# Altium PCB PCB.PcbDoc
Units mm, origin at the board's own origin, x right, y up, seen from the top; angles counter-clockwise.
Board outline 100.08 x 50.04 mm, 2 copper layers (Top Layer, Bottom Layer); 74 components, 44 nets, 202 pads, 18 vias.
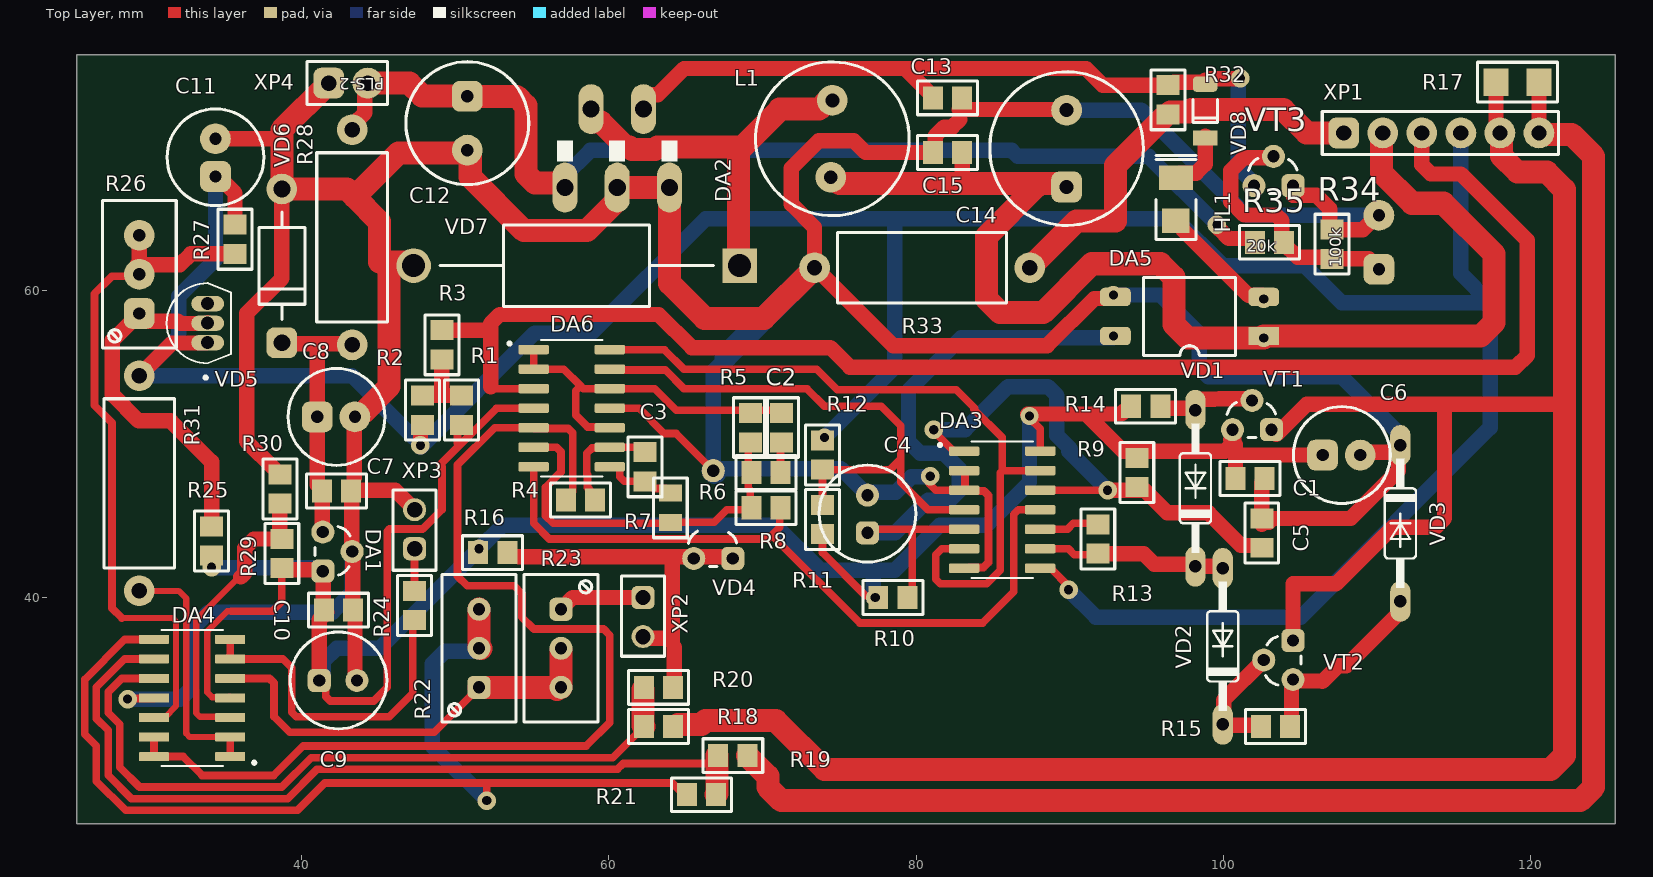
[diagram p0: Top Layer view]
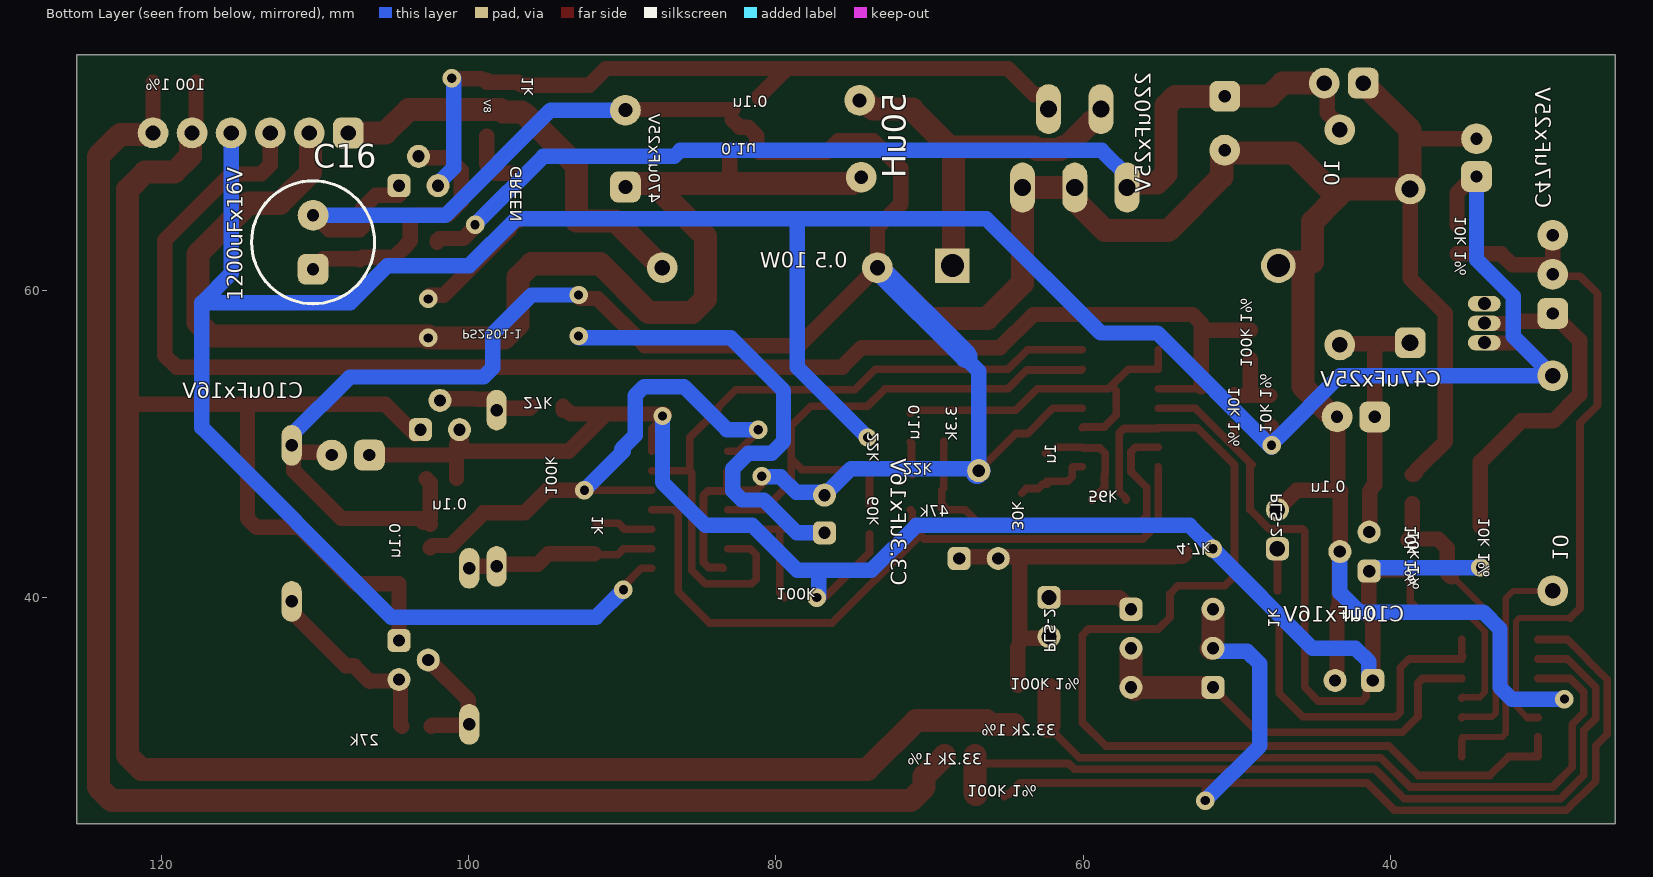
[diagram p1: Bottom Layer view, seen from below]

## Layer stack, top to bottom
Top Solder: solder mask 0.0102, Solder Resist, Dk 3.5
Top Layer: signal copper 0.0356
Dielectric 1: dielectric 0.32, FR-4, Dk 4.8
Bottom Layer: signal copper 0.0356
Bottom Solder: solder mask 0.0102, Solder Resist, Dk 3.5

## Board outline
25.4,25.273 25.4,75.311 125.476,75.311 125.476,25.273

## Design rules (kind name [scope] priority, off if disabled: settings)
Clearance [All] p1: gap=0.254 ignorepadtopadclearanceinfootprint=FALSE except(0: Arc-Hole Track-Hole SMDPad-Hole THPad-Hole Via-Hole Fill-Hole Poly-Hole Region-Hole Text-Hole)
PolygonConnect [All] p1: connectstyle=Relief reliefconductorwidth=0.254 reliefentries=4 polygonreliefangle="90 Angle" airgapwidth=0.254
RoomDefinition Main [InComponentClass('Main')] p1: confinementstyle=ConfineIn formatcopy=TRUE lockcomponents=FALSE outline 46.101,25.527 124.968,25.527 124.968,56.769 46.101,56.769
RoomDefinition Power [InComponentClass('Power')] p2: confinementstyle=ConfineIn formatcopy=TRUE lockcomponents=FALSE outline 25.527,75.127 25.527,28.772 45.827,28.772 45.827,75.127
RoomDefinition Heater [InComponentClass('Heater')] p3: confinementstyle=ConfineIn formatcopy=TRUE lockcomponents=FALSE outline 46.609,57.023 123.952,57.023 123.952,75.184 46.609,75.184
RoutingVias [All] p1: holewidth=0.711 width=1.27 viastyle="Through Hole" minholewidth=0.711 minwidth=1.27 maxholewidth=0.711 maxwidth=1.27
SolderMaskExpansion [All] p1: expansion=0.102 istentingtop=FALSE
Width [All] p1: maxlimit=2 minlimit=0.2 preferedwidth=1 toplayer_prefwidth=0.5 bottomlayer_minwidth=0.5 minimp=50.000000 maximp=50.000000 favimp=50.000000
30 further rules are at their usual default settings.

## Classes and differential pairs
component class Power: C7 C8 C9 C10 C11 DA1 DA4 R25 R26 R27 R28 R29 R30 R31 VD5 VD6 XP4
component class Main: C1 C2 C3 C4 C5 C6 DA3 DA5 DA6 R1 R2 R3 R4 R5 R6 R7 R8 R9 R10 R11 R12 R13 R14 R15 R16 R17 R18 R19 R20 R21 R22 R23 R24 VD1 VD2 VD3 VD4 VT1 VT2 XP1 XP2 XP3
component class Heater: C12 C13 C14 C15 C16 DA2 HL1 L1 R32 R33 R34 R35 VD7 VD8 VT3

## Components (designator, comment, footprint, x,y, rotation, side; value= is the part's Value field where it differs from the comment)
C1 "0.1u" CR2012-0805#1 101.727,47.752 r0 top
C2 "0.1u" CR2012-0805#1 71.247,51.054 r270 top
C3 "1u" CR2012-0805#1 62.357,48.514 r270 top
C4 "C3.3uFx16V" C6.3x11#1 76.835,45.466 r90 top
C5 "0.1u" CR2012-0805#1 102.489,44.196 r270 top
C6 "C10uFx16V" C6.3x11#2 107.696,49.276 r0 top
C7 "0.1u" CR2012-0805#1 42.291,46.933 r0 top
C8 "C47uFx25V" C6.3x11#2 42.291,51.759 r0 top
C9 "C10uFx16V" C6.3x11#1 42.418,34.614 r0 top
C10 "0.1u" CR2012-0805#1 42.418,39.186 r0 top
C11 "C47uFx25V" C6.3x11#2 34.417,68.65 r90 top
C12 "220uFx25V" C8x11.5 50.8,70.866 r270 top
C13 "0.1u" CR2012-0805#1 82.042,72.517 r0 top
C14 "470uFx25V" C10x16 89.789,69.215 r90 top
C15 "0.1u" CR2012-0805#1 82.042,68.961 r180 top
C16 "1200uFx16V" C8x20 110.109,63.119 r90 bottom
DA1 "L78L08ACZ'" to-92 41.402,42.996 r90 top
DA2 "LM2576ADJ" TO220-5 60.554,74.886 r0 top
DA3 "CD4066BM" SOIC127P600X175-14N 85.598,45.72 r0 top
DA4 "LM324" SOIC127P600X175-14N 32.893,33.471 r180 top
DA5 "PS2501-1" "DIP4-Gull Wing" 102.616,57.023 r180 top
DA6 "LM324" SOIC127P600X175-14N 57.593,52.324 r0 top
HL1 "GREEN" CR3216-1206-LED 96.901,65.913 r90 top
L1 "50uH" RCH114 74.549,69.85 r270 top
R1 "10k 1%" CR2012-0805#1 50.419,52.197 r270 top
R2 "10k 1%" CR2012-0805#1 47.879,52.197 r90 top
R3 "100k 1%" CR2012-0805#1 49.149,56.449 r90 top
R4 "56k" CR2012-0805#1 58.166,46.355 r180 top
R5 "3.3k" CR2012-0805#1 69.215,51.054 r270 top
R6 "22k" CR2012-0805#1 70.231,48.133 r180 top
R7 "30k" CR2012-0805#2 64.008,45.847 r90 top
R8 "47k" CR2012-0805#1 70.231,45.847 r0 top
R9 "100k" CR2012-0805#1 94.361,48.133 r90 top
R10 "100k" CR2012-0805#1 78.486,40.005 r180 top
R11 "60k" CR2012-0805#1 73.914,45.085 r270 top
R12 "22k" CR2012-0805#1 73.914,49.276 r270 top
R13 "1k" CR2012-0805#1 91.821,43.815 r270 top
R14 "27k" CR2012-0805#1 94.935,52.451 r180 top
R15 "27k" CR2012-0805#1 103.378,31.623 r180 top
R16 "4.7k" CR2012-0805#1 52.451,42.926 r180 top
R17 "100 1%" CR3216-1206 119.126,73.533 r0 top
R18 "33.2k 1%" CR2012-0805#1 63.246,31.623 r0 top
R19 "33.2k 1%" CR2012-0805#1 68.072,29.718 r0 top
R20 "100k 1%" CR2012-0805#1 63.246,34.163 r180 top
R21 "100k 1%" CR2012-0805#1 66.04,27.178 r180 top
R22 "1.37k" 3296W#1 51.562,36.703 r90 top
R23 "2.21k" 3296W#1 56.896,36.703 r270 top
R24 "1k" CR2012-0805#1 47.371,39.497 r90 top
R25 "10k 1%" CR2012-0805#1 34.163,43.692 r270 top
R26 "17.4k" 3296W#2 29.464,61.03 r90 top
R27 "10k 1%" CR2012-0805#1 35.687,63.316 r270 top
R28 "10" R-1W 43.307,63.443 r270 top
R29 "10k 1%" CR2012-0805#1 38.735,42.869 r270 top
R30 "10k 1%" CR2012-0805#1 38.608,47.06 r270 top
R31 "10" R-1W 29.464,47.441 r90 top
R32 "1k" CR2012-0805#1 96.393,72.39 r270 top
R33 "0.5 10W" R-1W 80.391,61.468 r0 top
R34 "100k" CR2012-0805#1 107.061,62.992 r90 top
R35 "20k" CR2012-0805#1 102.997,63.119 r0 top
VD1 "1N4148" DO35-10 98.171,47.117 r90 top
VD2 "1N4148" DO35-10 99.949,36.83 r90 top
VD3 "1N4148" DO35-10 111.506,44.831 r270 top
VD4 "TL-431LP" TO-92#1 66.802,42.545 r180 top
VD5 "LM385Z-1.2/NOPB" DIO_LM385Z-2.5/NOPB 33.909,57.855 r90 top
VD6 "18V1W" DO-41 38.735,66.585 r270 top
VD7 "1N5822" DIOAD2120W130L950D530P 57.912,61.595 r180 top
VD8 "8V" SOD-80 98.806,73.406 r270 top
VT1 "2N3904" TO-92#2 101.854,50.927 r180 top
VT2 "2N3906" TO-92#2 104.521,35.941 r270 top
VT3 "2N3906" TO-92#2 103.251,66.802 r180 top
XP1 "PLS-6" PLS-6 107.823,70.231 r90 top
XP2 "PLS-2" PLS-2#1 62.23,40.005 r0 top
XP3 "PLS-2" PLS-2#1 47.371,43.18 r180 top
XP4 "PLS-2" PLS-2#2 41.783,73.476 r90 top

## Footprints (in the part's own frame and the unit in brackets; to place one, negate y for a bottom-side part, rotate by r counter-clockwise, add the part's x,y. Pads: shape width x height; smd on the part's side, far side on the other; paste and mask are expansions set on the pad)
3296W#1 [mm]
  rrect50% 1.5x1.5 hole 0.8: 1(-2.54,0)
  round 1.5 hole 0.8: 2(0,0) 3(2.54,0)
  silkscreen extent -4.8,-2.4 4.8,2.4
3296W#2 [mm]
  rrect50% 2x2 hole 0.8: 1(-2.54,0)
  round 2 hole 0.8: 2(0,0) 3(2.54,0)
  silkscreen extent -4.8,-2.4 4.8,2.4
C6.3x11#1 [mm]
  rrect50% 1.5x1.5 hole 0.8: 1(-1.25,0)
  round 1.5 hole 0.8: 2(1.2,0)
  silkscreen extent -3.15,-3.15 3.15,3.15
C6.3x11#2 [mm]
  rrect50% 2x2 hole 0.8: 1(-1.25,0)
  round 2 hole 0.8: 2(1.2,0)
  silkscreen extent -3.15,-3.15 3.15,3.15
C8x11.5 [mm]
  rrect50% 2x2 hole 0.8: 1(-1.75,0)
  round 2 hole 0.8: 2(1.75,0)
  silkscreen extent -4,-4 4,4
C8x20 [mm]
  rrect50% 2x2 hole 0.8: 1(-1.75,0)
  round 2 hole 0.8: 2(1.75,0)
  silkscreen extent -4,-4 4,4
C10x16 [mm]
  rrect50% 2x2 hole 0.9: 1(-2.5,0)
  round 2 hole 0.9: 2(2.5,0)
  silkscreen extent -5,-5 5,5
CR2012-0805#1 [mm]
  rect 1.3x1.5 smd: 1(-0.95,0) 2(0.95,0)
  silkscreen extent -1.95,-1.1 1.95,1.1
CR2012-0805#2 [mm]
  rect 1.1x1.5 smd: 1(-0.95,0) 2(0.95,0)
  silkscreen extent -1.95,-1.1 1.95,1.1
CR3216-1206 [mm]
  rect 1.6x1.8 smd: 1(-1.4,0) 2(1.4,0)
  silkscreen extent -2.6,-1.3 2.6,1.3
CR3216-1206-LED [mm]
  rect 1.6x1.8 smd: 1(-1.4,0)
  rect 1.6x2.2 smd: 2(1.4,0)
  silkscreen extent -2.6,-1.3 2.85,1.3
DIO_LM385Z-2.5/NOPB [mm]
  oval 1x2.14 hole 0.85 mask+0: 1(-1.27,0) 2(0,0) 3(1.27,0)
  silkscreen extent -3.64,-1.52 2.61,2.67
DIOAD2120W130L950D530P [mm]
  round 2.25 hole 1.5: A(10.6,0)
  rect 2.25x2.25 hole 1.5: C(-10.6,0)
  silkscreen extent -8.89,-2.65 8.89,2.65
"DIP4-Gull Wing" [mm]
  rect 2x1.2 smd: 1(0,0)
  rrect50% 2x1.2 smd: 2(0,-2.54) 3(9.65,-2.54) 4(9.65,0)
  silkscreen extent 1.84,-3.81 7.82,1.27
DO35-10 [mil]
  oval 104x52 hole 32: A(200,0) C(-200,0)
  silkscreen extent -165,-40 165,40
DO-41 [mm]
  round 2 hole 1.1: 1(0,0)
  rrect50% 2x2 hole 1.1: 2(10,0)
  silkscreen extent 1.5,-1.5 8.5,1.5
PLS-2#1 [mm]
  rrect50% 1.5x1.5 hole 1: 1(0,0)
  round 1.5 hole 1: 2(0,-2.54)
  silkscreen extent -1.4,-3.82 1.4,1.4
PLS-2#2 [mm]
  rrect50% 2x2 hole 1: 1(0,0)
  round 2 hole 1: 2(0,-2.54)
  silkscreen extent -1.4,-3.82 1.4,1.4
PLS-6 [mm]
  rrect50% 2x2 hole 1: 1(0,0)
  round 2 hole 1: 2(0,-2.54) 3(0,-5.08) 4(0,-7.62) 5(0,-10.16) 6(0,-12.7)
  silkscreen extent -1.4,-13.97 1.4,1.4
R-1W [mm]
  round 2 hole 1: 1(-7,0) 2(7,0)
  silkscreen extent -5.5,-2.3 5.5,2.3
RCH114 [mm]
  round 2 hole 0.9: 1(-2.5,0) 2(2.5,-0.1)
  silkscreen extent -5,-5 5,5
SOD-80 [mm]
  rrect50% 1x1.6 smd: 1(0,0)
  rect 1x1.6 smd: 2(3.5,0)
  silkscreen extent 1,-0.8 2.5,0.8
SOIC127P600X175-14N [mm]
  rrect25% 1.97x0.6 smd: 1(-2.475,3.81) 2(-2.475,2.54) 3(-2.475,1.27) 4(-2.475,0) 5(-2.475,-1.27) 6(-2.475,-2.54) 7(-2.475,-3.81) 8(2.475,-3.81) 9(2.475,-2.54) 10(2.475,-1.27) 11(2.475,0) 12(2.475,1.27) 13(2.475,2.54) 14(2.475,3.81)
  silkscreen extent -4.14,-4.43 2,4.43
TO220-5 [mil]
  oval 64x128 hole 44: 1(-134,-323.26) 2(-67,-122.26) 3(0,-323.26) 4(67,-122.26) 5(134,-323.26)
  silkscreen extent -154,-256 154,-203
to-92 [mm]
  rrect50% 1.5x1.5 hole 0.8: 1(-1.27,0)
  round 1.5 hole 0.8: 2(0,-1.905) 3(1.27,0)
  silkscreen extent -1.52,-1.78 1.62,0.51
TO-92#1 [mm]
  rrect50% 1.5x1.5 hole 0.8: 1(-1.27,0)
  round 1.5 hole 0.8: 2(0,-5.715) 3(1.27,0)
  silkscreen extent -1.52,-1.78 1.62,0.51
TO-92#2 [mm]
  rrect50% 1.5x1.5 hole 0.8: 1(-1.27,0)
  round 1.5 hole 0.8: 2(0,-1.905) 3(1.27,0)
  silkscreen extent -1.52,-1.78 1.62,0.51

## Part data
C1 C2 C5 C7 C10 C13 C15: library part C0805-0.1u-X7R
C3: library part C0805-1u-X7R
C4: library part C10uFx16V
C12: library part "C220uFx25V YAGEO SY", "SY025M0220A3F-0811"
C14: library part "C470uFx25V KF"
C16: library part "C1000uFx16V LZ"
DA2: "<B>LM 2576 Adj</B><br> SIMPLE SWITCHER 3-A Step-Down Voltage Regulator", Package=None, Availability=Unavailable, MF="ON Semiconductor", MP=LM2576ADJ, Price=None, SnapEDA_Link=https://www.snapeda.com/parts/LM2576ADJ/ON%20Semiconductor/view-part/543608/?ref=snap
DA3: "Bilateral, FET Switches 1 x 1:1 14-SOIC", Package="SOIC-14 Texas Instruments", Availability=Unavailable, MF="Texas Instruments", MP=CD4066BM, Price=None, SnapEDA_Link=https://www.snapeda.com/parts/CD4066BM/Texas%20Instruments/view-part/342060/?ref=snap
DA4 DA6: "General Purpose Amplifier 4 Circuit 14-SOIC", Package="SOIC-14 Texas Instruments", Availability=Unavailable, MF="Texas Instruments", MP=LM324, Price=None, SnapEDA_Link=https://www.snapeda.com/parts/LM324/Texas%20Instruments/view-part/2758578/?ref=snap
HL1: library part LED_GREEN_1206
L1: library part RCH114NP-221KB
R1 R2 R25 R27 R29 R30: library part R0805-10k-1%
R3 R9 R10 R20 R21 R34: library part R0805-100k-5%
R4: library part R0805-51k-5%
R5: library part R0805-3k3-5%
R6 R12 R14 R15: library part R0805-22k-5%
R7: library part R0805-30k-5%
R8 R11: library part R0805-47k-5%
R13 R24 R32: library part R0805-1k-5%
R16: library part R0805-4k7-5%
R17: library part R1206-100-5%
R18 R19: library part R0805-33k-5%
R22 R23 R26: library part 3296W-1-103
R28 R31: library part R-1W-10R
R33: library part R-1W-5R1
R35: library part R0805-20k-5%
VD1 VD2 VD3: "Diode Standard 100V 200mA Through Hole DO-35", Package="DO-35 Nexperia USA Inc.", Availability=Unavailable, MF="Nexperia USA Inc.", MP=1N4148, Price=None, SnapEDA_Link=https://www.snapeda.com/parts/1N4148/Nexperia%20USA%20Inc./view-part/4413009/?ref=snap
VD5: library part LM385Z-2.5/NOPB, "Shunt Voltage Reference IC Â±3% TO-92-3", Package="TO-92 ON Semiconductor", Availability=Unavailable, MF="ON Semiconductor", MP=LM385Z-2.5, Price=None, SnapEDA_Link=https://www.snapeda.com/parts/LM385Z-2.5/ON%20Semiconductor/view-part/6788/?ref=snap
VD6: library part 1N4746A
VD7: "Diode Schottky 40V 3A Through Hole", Package="DO-201AD-201 Panjit", Availability=Unavailable, MF="ON Semiconductor", MP=1N5822, Price=None, SnapEDA_Link=https://www.snapeda.com/parts/1N5822/ON%20Semiconductor/view-part/1356736/?ref=snap
VD8: library part BZV55-C3V0
VT1: "TO-92", Package=None, Availability=Unavailable, MF=Rectron, MP=2N3904, Price=None, SnapEDA_Link=https://www.snapeda.com/parts/2N3904/Rectron/view-part/4705619/?ref=snap
VT2 VT3: "TRANS PNP 40V 0.2A TO92", Package="TO-226-3 Diotec Semiconductor", Availability=Unavailable, MF="Diotec Semiconductor", MP=2N3906, Price=None, SnapEDA_Link=https://www.snapeda.com/parts/2N3906/Diotec/view-part/4705783/?ref=snap

## Via types
v1: diameter 1.2, hole 0.6, Top Layer to Bottom Layer, 18 vias

## Nets (pads, with @x,y where several pads share a name; then routed paths per layer and width w, separated by ;. In a path a pad name is that pad's centre, name@x,y a point inside that pad or via, vN(x,y) a via of type N, cw(c..) or ccw(c..) an arc to the next point about the centre after c; other vN are vias at no path point)
4: DA3.4 DA6.13 R11.1 R12.2 | length 36.7
  Top Layer w0.5: DA6.13 60.118,54.814 63.677,54.814 64.897,53.594 72.898,53.594 74.041,52.451 77.724,52.451 78.994,51.181 78.994,49.022 ; R11.1 R12.2 78.298,48.326 78.994,49.022 ; DA3.4 80.772,45.72 78.994,47.498 78.994,49.022
+4V: C1.1 C6.1 C9.1 C10.1 DA1.1 DA3.14 DA4.4 DA6.4 R1.2 R9.2 R10.2 R11.2 R14.2 R16.2 R25.2 R29.2 VT1.3 | length 157.9
  Top Layer w0.4: DA4.4@35.318,33.521 34.202,33.521 33.879,33.844 33.879,37.816 35.179,39.116 35.433,39.116
  Top Layer w0.5: DA4.4@35.318,33.521 DA4.4 ; 35.433,39.116 38.1,39.116 38.735,39.751 38.735,41.656 R29.2@38.862,41.783 ; C9.1 41.591,34.191 41.591,33.567 41.884,33.274 44.704,33.274 45.593,34.163 45.593,44.323 45.736,44.466 47.89,44.466 49.149,45.725 49.149,48.514 49.022,48.641 52.705,52.324 DA6.4 ; 50.165,50.038 50.165,50.993 R1.2 ; R11.2 73.914,42.926 76.708,40.132 ; v1@87.376,51.689 88.073,50.992 DA3.14
  Top Layer w1: R29.2 38.831,41.822 41.306,41.822 DA1.1 41.435,41.693 41.435,39.153 C10.1@41.529,39.059 ; C9.1 41.168,38.571 C10.1@41.656,39.059 ; v1@87.249,51.943 91.059,51.943 ; R14.2@93.853,52.451 93.853,52.219 93.835,52.201 93.603,52.201 93.345,51.943 91.059,51.943 ; VT1.3@100.457,50.284 100.652,50.088 100.777,49.964 100.777,49.403 ; VT1.3 100.68,50.831 100.68,50.116 100.094,49.53 93.472,49.53 91.059,51.943 ; C1.1 100.777,49.403 ; C6.1@106.299,49.403 106.172,49.276 100.904,49.276 100.777,49.403
  Bottom Layer w1: v1(34.163,41.98) 34.201,41.942 41.186,41.942 DA1.1 ; C9.1 41.418,34.864 41.418,35.83 42.291,36.703 45.085,36.703 v1(51.562,43.18) 53.086,44.704 70.866,44.704 73.787,41.783 77.216,41.783 ; v1@77.216,40.005 77.216,41.783 ; v1(87.376,51.816) 87.376,47.498 84.582,44.704 81.534,44.704 78.613,41.783 77.216,41.783
  other v1: 77.343,40.005
+12V: C12.1 DA2.1 R28.1 R35.1 XP4.2 | length 70.2
  Top Layer w1: R28.1@43.434,70.428 43.434,70.841 44.132,71.538 44.132,73.285 XP4.2 ; DA2.1@56.861,66.978 57.023,66.816 DA2.1@57.023,66.675 ; v1@99.695,64.008 100.334,63.369 101.897,63.369 102.047,63.219 R35.1
  Top Layer w1.5: XP4.2 47.031,73.476 47.863,72.644 C12.1@50.673,72.644 ; C12.1 54.003,72.616 54.61,72.009 54.61,67.564 55.196,66.978 DA2.1@56.861,66.978
  Bottom Layer w1: DA2.1@57.023,66.675 57.023,67.322 58.805,69.104 86.217,69.104 86.614,68.707 95.123,68.707 v1(99.568,64.262)
-4V: C1.2 C4.2 C5.1 C6.2 C7.2 C8.2 C9.2 C10.2 C11.2 C12.2 C13.2 C14.2 C15.2 C16.2 DA1.2 DA2.3 DA2.5 DA3.2 DA3.3 DA3.7 DA4.11 DA5.3 DA6.11 R30.1 R33.1 R34.2 VD3.C VD4.2 VD6.1 VD7.A VT3.1 XP3.2 XP4.1 | length 320.5
  Top Layer w0.5: v1(28.702,33.401) 28.737,33.436 30.383,33.436 DA4.11 ; DA6.11 61.976,52.324 63.627,50.673 64.389,50.673 VD4.2 ; v1(80.918,47.898) 80.852,47.832 80.852,47.418 81.28,46.99 DA3.3 83.173,46.94 DA3.3@83.185,46.94 ; DA3.2 83.135,48.26 83.185,48.21 DA3.3@83.185,46.94 ; DA3.7@83.439,41.91 83.489,41.96 84.378,41.96 84.709,42.291 84.709,46.647 84.416,46.94 DA3.3@83.185,46.94
  Top Layer w1: C11.2 38.297,69.85 38.735,69.412 ; VD6.1@38.481,66.491 38.735,66.237 38.735,60.776 36.449,58.49 36.449,50.169 38.358,48.26 38.358,48.16 38.508,48.01 R30.1 ; C7.2 43.274,46.9 DA1.2@43.274,42.902 ; DA1.2 43.338,42.965 43.338,39.409 C10.2@43.434,39.313 ; C10.2 43.493,39.061 43.493,34.809 C9.2@43.688,34.614 ; C7.2@43.434,46.99 46.101,46.99 XP3.2 ; 43.434,47.769 43.434,51.702 C8.2 ; 45.212,61.849 45.227,61.834 ; VD7.A@47.073,61.834 VD7.A ; C12.2@50.609,68.925 C12.2 ; DA2.3@60.554,65.862 DA2.3 ; R33.1@73.406,61.468 73.391,61.483 73.391,64.087 71.882,65.596 71.882,67.945 73.66,69.723 75.946,69.723 76.708,68.961 C15.2 81.242,69.111 81.242,70.026 81.828,70.612 82.345,70.612 82.842,71.109 ; R33.1@73.533,61.341 73.556,61.341 78.508,56.389 88.52,56.389 91.594,59.463 92.737,59.463 DA5.3@92.837,59.563 ; 82.804,71.755 C14.2@89.822,71.755 ; C5.1@102.489,44.765 102.639,44.915 102.954,44.915 C5.1@103.185,45.146 ; C1.2@102.743,47.752 102.743,47.718 102.489,47.464 C5.1 C5.1@103.185,45.146 ; VT3.1@104.521,66.167 106.045,66.167 106.905,65.307 106.905,64.092 R34.2@106.934,64.092 ; R34.2 109.061,63.942 109.889,64.77 C16.2@110.109,64.77 ; C6.2 109.087,49.467 111.358,49.467 VD3.C@111.379,49.489 ; VD3.C@111.379,50.038 VD3.C@111.379,49.489 ; VD3.C 111.506,49.616 VD3.C@111.379,49.489 ; C5.1@103.185,45.146 108.265,45.146 111.379,48.26 VD3.C@111.379,49.489
  Top Layer w1.5: VD6.1 42.959,66.585 43.469,66.075 ; VD6.1@38.735,66.745 38.735,69.412 38.735,70.428 XP4.1 ; C8.2 43.626,51.759 43.876,52.009 43.992,52.009 45.72,53.737 45.72,61.834 ; 45.085,61.849 45.085,64.459 43.469,66.075 ; 45.227,61.834 45.72,61.834 ; VD7.A@47.073,61.834 45.72,61.834 ; C12.2@50.609,68.925 46.319,68.925 43.469,66.075 ; C12.2@50.991,68.654 50.991,67.373 54.483,63.881 58.572,63.881 DA2.3@60.554,65.862 ; DA2.3 DA2.5@63.881,66.675 ; DA2.5@64.008,66.802 63.957,66.751 DA2.5 63.957,60.445 66.237,58.166 70.089,58.166 R33.1
  Bottom Layer w1: v1(28.702,33.401) 32.131,33.401 32.893,34.163 32.893,37.973 33.979,39.059 42.037,39.059 43.307,40.329 DA1.2 ; VD4.2 VD4.2@66.802,48.387 ; 67.691,55.626 66.802,54.737 VD4.2@66.802,48.387 ; C4.2@76.835,46.736 76.765,46.736 75.114,48.387 VD4.2@66.802,48.387 ; C4.2@76.835,46.863 78.691,46.863 79.688,47.859 80.879,47.859 v1(80.918,47.898) ; C14.2@89.789,71.755 89.829,71.715 94.655,71.715 101.501,64.869 C16.2 ; v1(92.837,59.69) 95.885,59.69 98.425,57.15 98.425,54.942 99.011,54.356 107.721,54.356 111.506,50.571 VD3.C
  Bottom Layer w1.5: VD4.2 VD4.2@66.929,48.133 ; 67.62,55.697 R33.1
HT+: C14.1 C15.1 DA5.1 L1.2 XP1.2 | length 81.5
  Top Layer w1: C15.1 82.992,67.249 83.058,67.183
  Top Layer w1.5: L1.2 74.584,67.35 75.005,66.929 82.992,66.929 87.797,66.929 89.575,66.929 C14.1 ; 87.797,66.715 84.582,63.5 84.582,59.426 85.461,58.547 88.265,58.547 91.44,61.722 95.895,61.722 96.774,60.843 96.774,57.775 97.653,56.896 v1(102.616,56.896) ; DA5.1 116.723,57.023 117.602,57.902 117.602,62.357 114.3,65.659 112.268,65.659 110.267,67.66 XP1.2@110.267,70.262
HT-: R32.2 R33.2 XP1.1 | length 27.2
  Top Layer w1: R33.2@87.757,61.341 R33.2@87.757,61.372 ; R32.2@96.293,71.44 R32.2 R32.2@96.543,71.59 ; 97.752,71.59 97.917,71.755
  Top Layer w1.5: R33.2 90.439,64.516 92.964,64.516 92.964,68.111 R32.2@96.293,71.44 ; R32.2@96.543,71.59 97.752,71.59 ; 97.917,71.755 103.886,71.755 105.41,70.231 XP1.1@107.569,70.231
HtEnd-: DA5.2 HL1.1 | length 8
  Top Layer w1: HL1.1@96.774,64.516 96.998,64.516 97.301,64.213 97.301,63.989 101.627,59.663 102.516,59.663 DA5.2
  other v1: 102.616,59.436
NetC2_1: C2.1 DA6.1 DA6.2 DA6.10 DA6.12 R5.1 | length 23
  Top Layer w0.5: DA6.2 57.085,54.864 58.164,53.785 58.355,53.594 DA6.12 62.992,53.594 64.389,52.197 67.63,52.197 69.215,52.197 71.054,52.197 C2.1 ; DA6.1 55.118,55.053 DA6.2@55.18,54.991 ; 58.101,53.721 57.847,53.467 57.847,51.881 58.624,51.104 60.018,51.104 DA6.10
NetC2_2: C2.2 R6.1 | length 2.2
  Top Layer w0.5: R6.1@71.12,48.006 71.181,48.067 R6.1 71.181,50.038 C2.2
NetC3_1: C3.1 DA6.9 R4.1 | length 6.9
  Top Layer w0.5: R4.1@59.436,46.355 59.436,46.389 58.97,46.855 58.936,46.855 58.624,47.167 58.624,48.004 58.579,48.049 58.579,49.396 58.917,49.734 60.018,49.734 DA6.9 C3.1@61.722,49.784 ; C3.1@62.318,49.403 C3.1@62.484,49.403
NetC3_2: C3.2 DA6.8 R7.2 | length 4.9
  Top Layer w0.5: DA6.8@60.071,48.514 60.678,48.514 60.728,48.464 60.728,47.857 61.021,47.564 C3.2 ; C3.2@62.357,47.371 62.65,47.371 62.924,47.097 63.708,47.097 R7.2
NetC4_1: C4.1 DA3.5 DA5.4 R10.1 | length 41.5
  Top Layer w0.5: C4.1 77.069,44.45 79.883,44.45 ; R10.1 79.756,40.325 79.756,44.196 ; 79.756,44.323 79.883,44.45 ; DA3.5 79.883,44.45
  Bottom Layer w1: C4.1 78.633,44.216 80.772,46.355 82.218,46.355 82.804,46.941 82.804,48.387 81.788,49.403 80.264,49.403 79.502,50.165 79.502,53.467 82.931,56.896 v1@92.837,56.896
  other v1: 92.837,57.023
NetC5_2: C5.2 DA3.1 DA3.12 R9.1 | length 35.2
  Top Layer w0.5: v1@81.041,50.927 82.438,49.53 DA3.1 ; DA3.12 v1(92.456,46.99)
  Top Layer w1: v1@92.71,46.99 94.869,46.99 96.327,45.532 99.054,45.532 ; 99.054,45.466 101.124,43.396 102.339,43.396 C5.2
  Bottom Layer w1: v1(81.153,50.927) 83.185,50.927 85.979,53.721 88.568,53.721 89.154,53.135 89.154,50.546 90.043,49.657 ; 89.916,49.53 v1(92.456,46.99)
NetC7_1: C7.1 C8.1 DA1.3 R28.2 VD6.2 | length 16.9
  Top Layer w1: VD6.2 38.806,56.514 41.041,56.514 42.997,56.514 R28.2@43.307,56.204 ; 41.021,56.458 41.041,56.438 C8.1 41.041,47.333 41.275,47.099 C7.1@41.275,47.06 ; C7.1 41.371,46.903 41.371,44.297 DA1.3
NetC13_1: C13.1 DA2.4 R32.1 VD8.1 VT3.3 | length 50.9
  Top Layer w1: DA2.4@62.23,71.755 62.23,72.399 62.544,72.713 63.188,72.713 64.897,74.422 79.287,74.422 ; C13.1 81.092,72.617 79.287,74.422 ; R32.1 92.141,73.34 91.059,74.422 79.287,74.422 ; R32.1@96.647,73.406 96.774,73.533 VD8.1@98.806,73.533 ; VD8.1@98.679,73.533 98.806,73.66 99.149,73.749 101.054,73.749 v1(101.092,73.787)
  Bottom Layer w1: v1@100.965,73.787 100.965,67.953 101.981,66.937 VT3.3
NetC16_1: C16.1 R34.1 R35.2 VT3.2 | length 17.5
  Top Layer w1: VT3.2 103.155,68.611 101.297,68.611 100.477,67.792 100.477,65.766 101.346,64.897 103.427,64.897 103.797,64.527 103.797,63.208 R35.2@103.947,63.058 ; R35.2@104.013,62.992 R35.2@103.947,63.058 ; R34.1@107.061,61.976 106.882,62.155 104.811,62.155 103.947,63.019 R35.2@103.947,63.058 ; R34.1 109.436,62.042 109.728,61.75 C16.1@109.728,61.214
NetDA2_2: DA2.2 L1.1 VD7.C | length 26.2
  Top Layer w1.5: DA2.2 58.852,71.002 58.91,70.944 59.485,70.944 61.124,69.305 61.349,69.305 61.503,69.151 63.008,69.151 63.162,69.305 68.363,69.305 68.453,69.215 ; VD7.C@68.453,61.341 68.453,69.088 71.12,71.755 ; 71.12,71.78 73.685,71.78 L1.1@74.295,72.39
NetDA3_6: DA3.6 DA3.13 DA6.14 | length 47.1
  Top Layer w0.5: DA6.14 63.627,56.134 64.897,54.864 73.533,54.864 74.867,53.53 82.614,53.53 83.82,52.324 ; DA3.6 81.661,43.18 81.28,42.799 81.28,41.187 81.573,40.894 84.582,40.894 85.471,41.783 85.471,47.967 ; 83.757,52.261 85.598,50.419 85.598,48.26 85.471,48.133 ; 85.764,48.26 DA3.13
NetDA3_9: DA3.9 R13.2 VD1.C VD2.A | length 12.1
  Top Layer w0.5: DA3.9 89.916,43.18 90.297,42.799 R13.2@91.694,42.799
  Top Layer w1: R13.2 94.803,42.865 95.504,42.164 VD1.C@98.171,42.164 ; VD1.C VD2.A@99.822,42.037
NetDA3_10: DA3.10 R13.1 | length 3.8
  Top Layer w0.5: DA3.10 89.849,44.45 90.23,44.831 R13.1@91.694,44.831
NetDA3_11: DA3.11 DA6.7 R8.2 | length 47.5
  Top Layer w0.5: DA6.7 55.118,44.831 56.134,43.815 70.358,43.815 70.485,43.942 ; R8.2@71.247,45.72 71.12,45.593 71.12,44.577 70.485,43.942 ; DA3.11 86.653,45.72 86.36,45.427 86.36,40.386 84.328,38.354 76.327,38.354 70.739,43.942 70.485,43.942
NetDA4_1: DA4.1 DA4.2 R31.1 | length 15.8
  Top Layer w0.4: R31.1@29.86,40.441 32.019,40.441 32.512,39.948 32.512,31.165 32.746,30.931 DA4.2
  Top Layer w0.5: DA4.2@35.306,30.804 35.368,30.742 DA4.1
NetDA4_3: DA4.3 R29.1 R30.2 | length 20
  Top Layer w0.4: DA4.3@35.318,32.251 33.4,32.251 33.166,32.485 33.166,38.57 36.322,41.726
  Top Layer w0.5: DA4.3@35.318,32.251 DA4.3
  Top Layer w1: 36.068,41.345 36.322,41.599 36.322,41.726 36.322,43.233 36.908,43.819 R29.1 ; R30.2 38.608,43.969 38.819,43.758 R29.1@38.862,43.758
NetDA4_5: DA4.5 R22.1 R23.2 R23.3 | length 27.5
  Top Layer w0.5: DA4.5 37.934,34.741 38.227,34.448 38.227,32.258 39.243,31.242 48.641,31.242 R22.1@51.435,34.036
  Top Layer w1.5: R22.1 56.515,34.163 R23.3@56.642,34.036 ; R23.3 R23.2@56.896,36.576
NetDA4_6: DA4.6 DA4.7 R24.1 | length 21.6
  Top Layer w0.5: DA4.6@35.306,36.195 35.368,36.257 DA4.7 ; DA4.6 38.792,36.011 39.37,35.433 39.37,32.551 39.663,32.258 45.72,32.258 47.244,33.782 47.244,38.354 R24.1@47.117,38.481
NetDA4_8: DA4.8 R21.2 R22.2 R22.3 | length 70.1
  Top Layer w0.5: DA4.8 28.518,37.281 25.908,34.671 25.908,31.115 26.67,30.353 26.67,28.067 28.575,26.162 39.751,26.162 41.529,27.94 52.07,27.94 ; v1@52.07,27.051 52.07,27.94 ; R21.2@64.897,27.178 64.135,27.94 52.07,27.94 ; R21.2@64.977,27.225 R21.2@65.151,27.051
  Top Layer w1.5: R22.3 51.562,36.83 R22.2@51.689,36.703
  Bottom Layer w1: R22.2@51.435,36.83 51.117,36.512 49.339,36.512 48.514,35.687 48.514,30.353 v1(52.07,26.797)
NetDA4_9: DA4.9 R19.1 R21.1 | length 54.5
  Top Layer w0.5: DA4.9 28.518,36.011 26.67,34.163 26.67,32.139 27.44,31.369 27.44,28.44 28.956,26.924 39.116,26.924 41.021,28.829 60.568,28.829 60.949,29.21 66.548,29.21 R19.1@67.056,29.718
  Top Layer w1.5: R21.1 67.056,27.244 R19.1@67.056,29.718
NetDA4_10: DA4.10 R18.1 R20.2 | length 46.7
  Top Layer w0.5: DA4.10 28.314,34.741 27.432,33.859 27.432,32.512 28.194,31.75 28.194,28.956 29.472,27.678 38.727,27.678 40.64,29.591 60.264,29.591 R18.1@61.796,31.123 ; R20.2@62.296,34.036 R20.2
  Top Layer w1.5: R20.2@62.23,34.036 62.23,31.689 R18.1
NetDA4_12: DA4.12 R26.2 R26.3 R27.2 | length 44.6
  Top Layer w0.4: 28.321,38.678 31.624,38.678 31.858,38.444 31.858,32.956 DA4.12@31.103,32.201
  Top Layer w0.5: 28.321,38.678 27.686,39.313 27.686,51.378 26.543,52.521 26.543,59.76 27.686,60.903 29.21,60.903 R26.2@29.337,61.03 ; DA4.12 DA4.12@31.103,32.201
  Top Layer w1: R26.2@29.337,61.665 R26.2@29.464,61.665 ; R26.3 R26.2@29.464,61.665 ; R27.2 32.812,62.366 32.112,61.665 R26.2@29.464,61.665
NetDA6_6: DA6.6 R5.2 R6.2 R7.1 R8.1 | length 24.6
  Top Layer w0.5: DA6.6 56.603,49.784 56.896,49.491 56.896,48.177 55.88,47.161 55.88,45.339 56.388,44.831 63.942,44.831 R7.1 66.868,44.897 67.691,45.72 68.881,45.72 69.088,45.927 R8.1@69.088,45.974 ; 69.088,47.117 69.088,48.133 R5.2@69.088,50.165 ; 69.215,46.99 69.215,45.913 R8.1
NetHL1_2: HL1.2 VD8.2 | length 4.2
  Top Layer w1: HL1.2 97.201,67.613 98.22,67.613 98.806,68.199 VD8.2@98.806,70.033 ; VD8.2 VD8.2@98.806,69.977
NetR1_1: R1.1 R2.2 R3.1 | length 4.7
  Top Layer w1: R2.2 50.099,53.147 R1.1@50.165,53.213 ; R3.1 49.149,53.34 49.276,53.213
NetR14_1: R14.1 VD1.A VT1.2 | length 6.4
  Top Layer w1: R14.1 96.012,52.324 98.171,52.324 98.171,52.771 98.319,52.919 99.401,52.919 ; 99.726,52.928 101.885,52.928 VT1.2@101.981,52.832
NetR15_1: R15.1 VD3.A VT2.3 | length 12.2
  Top Layer w1: R15.1 104.425,31.72 104.425,34.448 VT2.3@104.521,34.544 ; VT2.3@104.648,34.671 104.744,34.575 106.395,34.575 106.426,34.544 107.442,35.56 107.975,35.56 111.401,38.986 111.401,39.475 VD3.A@111.379,39.497
NetR15_2: R15.2 VD2.C VT2.2 | length 7.7
  Top Layer w1: VD2.C 100.01,31.811 100.01,33.335 VT2.2 ; VD2.C@100.076,31.623 100.076,31.665 100.097,31.686 102.364,31.686 R15.2
NetR16_1: R16.1 R20.1 VD4.1 VD4.3 XP2.2 | length 23.9
  Top Layer w1: R16.1 53.401,42.826 53.551,42.676 54.133,42.676 54.137,42.672 64.135,42.672 ; XP2.2 62.326,37.369 63.676,37.369 ; 64.135,37.084 64.135,42.672 ; R20.1@64.262,34.29 64.262,36.784 ; VD4.1@67.564,42.545 67.437,42.672 64.135,42.672
NetR17_1: R17.1 R18.2 VT1.1 VT2.1 XP1.5 | length 147.7
  Top Layer w1: VT1.1@103.441,50.609 105.41,52.578 114.3,52.578 ; VT2.1 104.521,40.894 107.315,40.894 110.998,44.577 113.792,44.577 114.378,45.163 114.378,52.578 121.92,52.578 122.047,52.705 ; XP1.5@117.726,70.759 R17.1
  Top Layer w1.5: R18.2@64.516,31.75 66.04,31.75 66.294,32.004 70.866,32.004 74.041,28.829 121.285,28.829 122.174,29.718 122.174,66.548 121.031,67.691 119.126,67.691 118.079,68.738 118.079,70.135 XP1.5
NetR17_2: R17.2 R19.2 XP1.6 | length 105.4
  Top Layer w1: XP1.6@120.523,70.358 120.524,70.359 120.524,73.531 R17.2
  Top Layer w1.5: R19.2 70.358,28.382 70.358,27.676 71.237,26.797 123.2,26.797 124.079,27.676 124.079,68.707 122.651,70.135 120.619,70.135 XP1.6
NetR23_1: R23.1 XP2.1 | length 5.6
  Top Layer w1: R23.1@57.023,39.37 57.658,40.005 XP2.1 ; XP2.1@62.23,40.132 XP2.1@62.357,40.132
NetR24_2: R24.2 XP3.1 | length 2.7
  Top Layer w0.5: R24.2 XP3.1
NetR25_1: R25.1 R26.1 VD5.2 | length 23.4
  Top Layer w1: R26.1@29.083,58.49 R26.1 29.964,57.99 31.964,57.99 32.115,57.839 VD5.2@33.909,57.839 ; R26.1@29.21,58.363 29.21,58.236 27.71,56.736 27.71,53.21 29.415,51.505 31.496,51.505 34.163,48.838 R25.1 ; VD5.2@33.89,57.874 VD5.2
SGND: C11.1 DA3.8 R2.1 R12.1 R27.1 R31.2 VD5.1 XP1.4 | length 195.1
  Top Layer w0.5: R2.1@47.752,51.12 R2.1 R2.1@47.879,51.054 ; DA3.8 88.758,41.91 89.916,40.752 v1(89.916,40.513)
  Top Layer w1: R31.2 31.589,56.566 VD5.1@33.782,56.566 ; C11.1@34.417,67.634 C11.1 34.917,66.9 35.101,66.9 35.687,66.314 R27.1 ; v1@47.752,50.038 R2.1@47.752,51.12
  Bottom Layer w1: C11.1 34.417,61.991 32.036,59.61 32.036,57.013 R31.2 43.29,54.441 v1@47.371,50.36 ; v1@47.752,49.784 55.181,57.213 58.864,57.213 66.294,64.643 96.901,64.643 99.949,61.595 105.283,61.595 107.696,59.182 117.348,59.182 ; v1(74.041,50.419) 78.613,54.991 78.613,64.516 ; v1(89.916,40.513) 91.694,38.735 105.029,38.735 117.348,51.054 117.348,59.182 ; XP1.4 115.443,61.087 117.348,59.182
  other v1: 47.752,49.911
Vs: DA6.3 R3.2 XP1.3 | length 97.9
  Top Layer w0.5: 52.324,53.721 52.451,53.594 DA6.3
  Top Layer w1: R3.2 52.075,57.399 52.197,57.277 ; 52.324,53.721 52.324,57.399 52.324,57.834 52.91,58.42 63.246,58.42 65.405,56.261 74.422,56.261 75.692,54.991 104.902,54.991 118.999,54.991 119.761,55.753 119.761,63.246 115.443,67.564 113.489,67.564 112.903,68.15 XP1.3
VSREF: DA4.13 DA4.14 DA6.5 R4.2 | length 71.3
  Top Layer w0.5: DA4.14@30.393,29.686 30.418,29.711 DA4.13 ; DA4.14 32.315,29.661 33.544,28.432 38.211,28.432 40.132,30.353 58.547,30.353 60.071,31.877 60.071,37.553 59.667,37.957 55.134,37.957 54.356,38.735 54.356,40.259 53.848,40.767 50.8,40.767 50.165,41.402 50.165,48.641 52.578,51.054 DA6.5 55.168,51.004 57.365,51.004 57.658,50.711 57.658,46.897 57.216,46.455 R4.2
pads on no net: VD5.3

## Silkscreen, mask and mechanical layers (free items; w line width, h text height)
Mechanical 1:
  the board outline again, w0.5